# Altium PCB powerdriver.PcbDoc (part 1 of 2)
Units mil, origin at the board's own origin, x right, y up, seen from the top; angles counter-clockwise.
Board outline 9161.49 x 7551.49 mil, 2 copper layers (Top Layer, Bottom Layer); 98 components, 95 nets, 352 pads, 131 vias.
Unrouted connection lines stored in the file: 6.
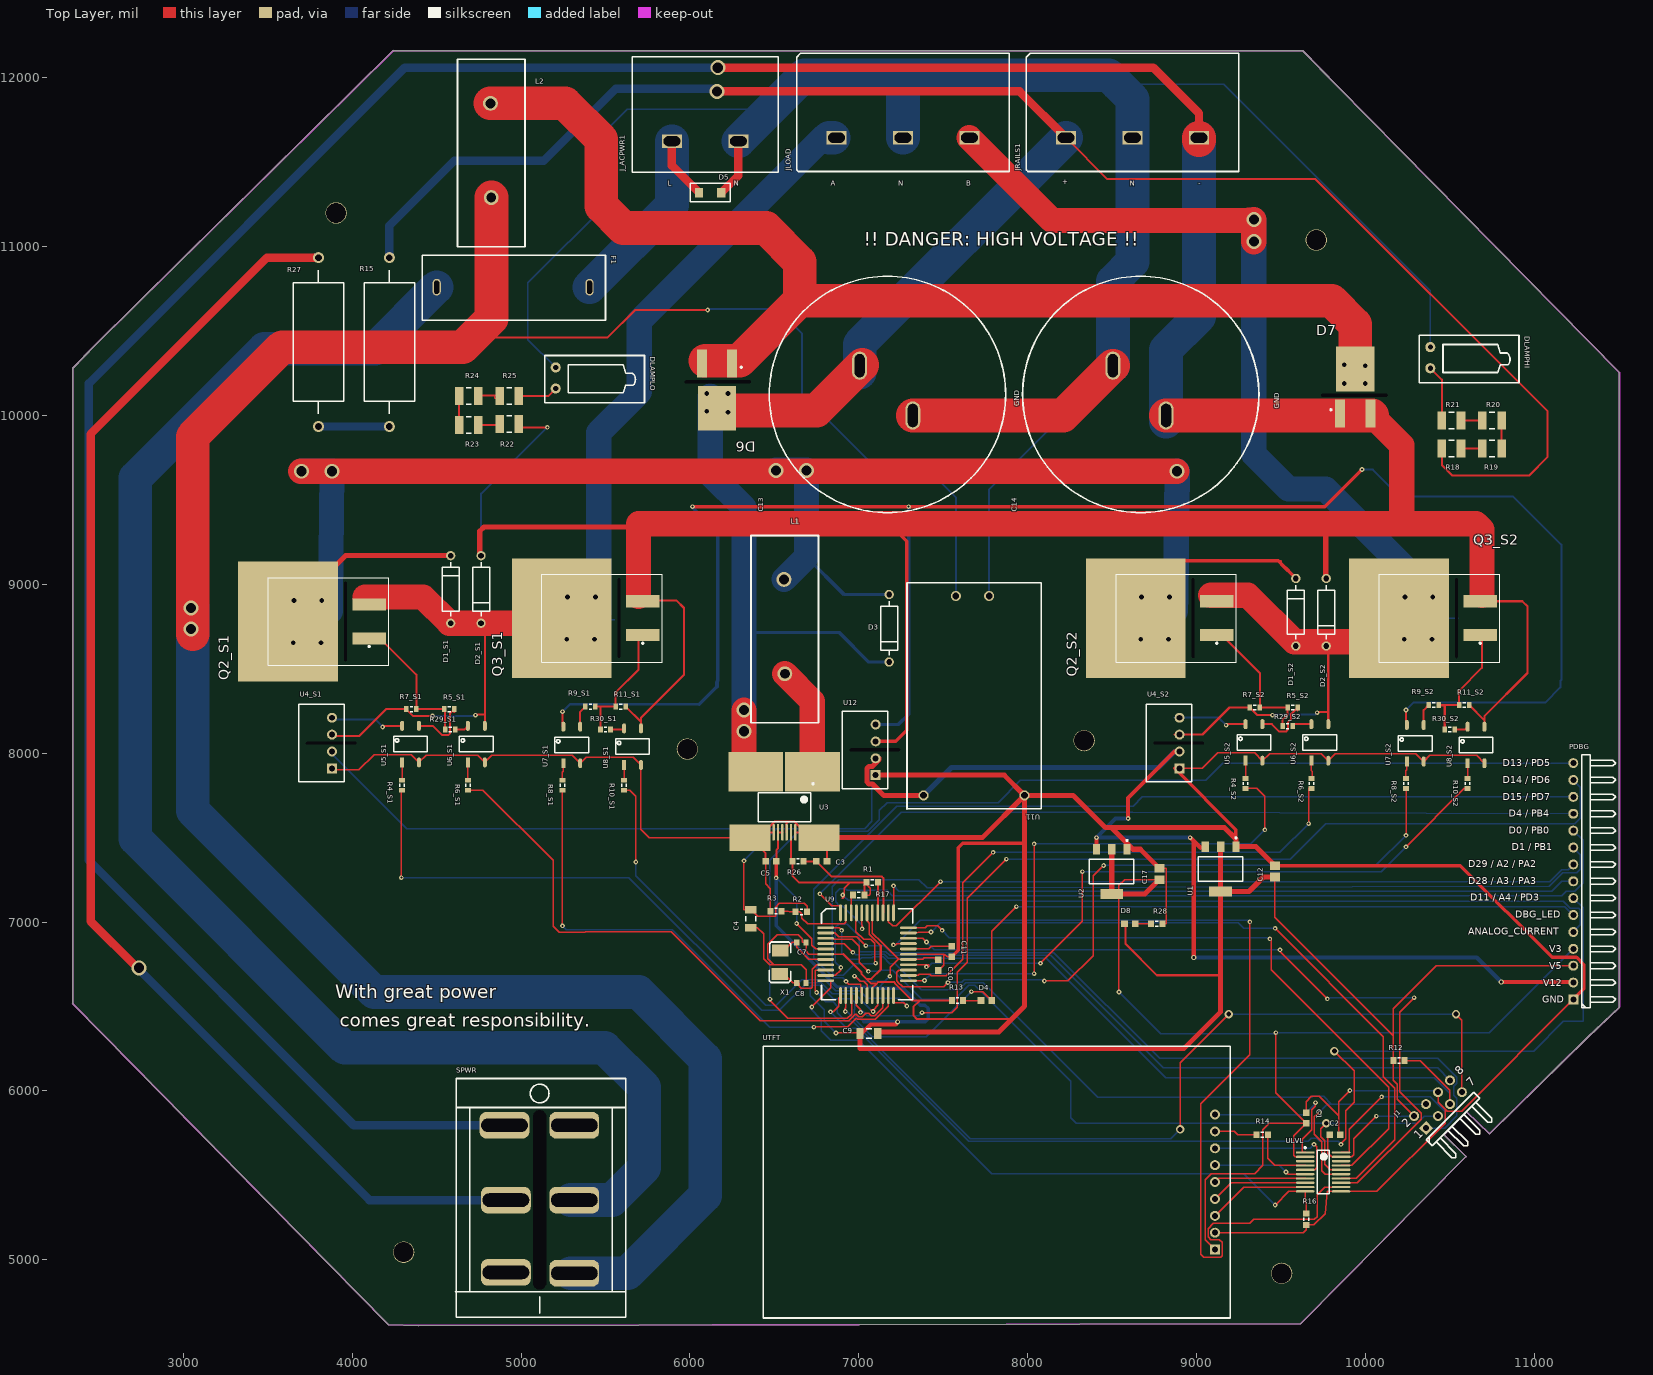
[diagram p0: Top Layer view]
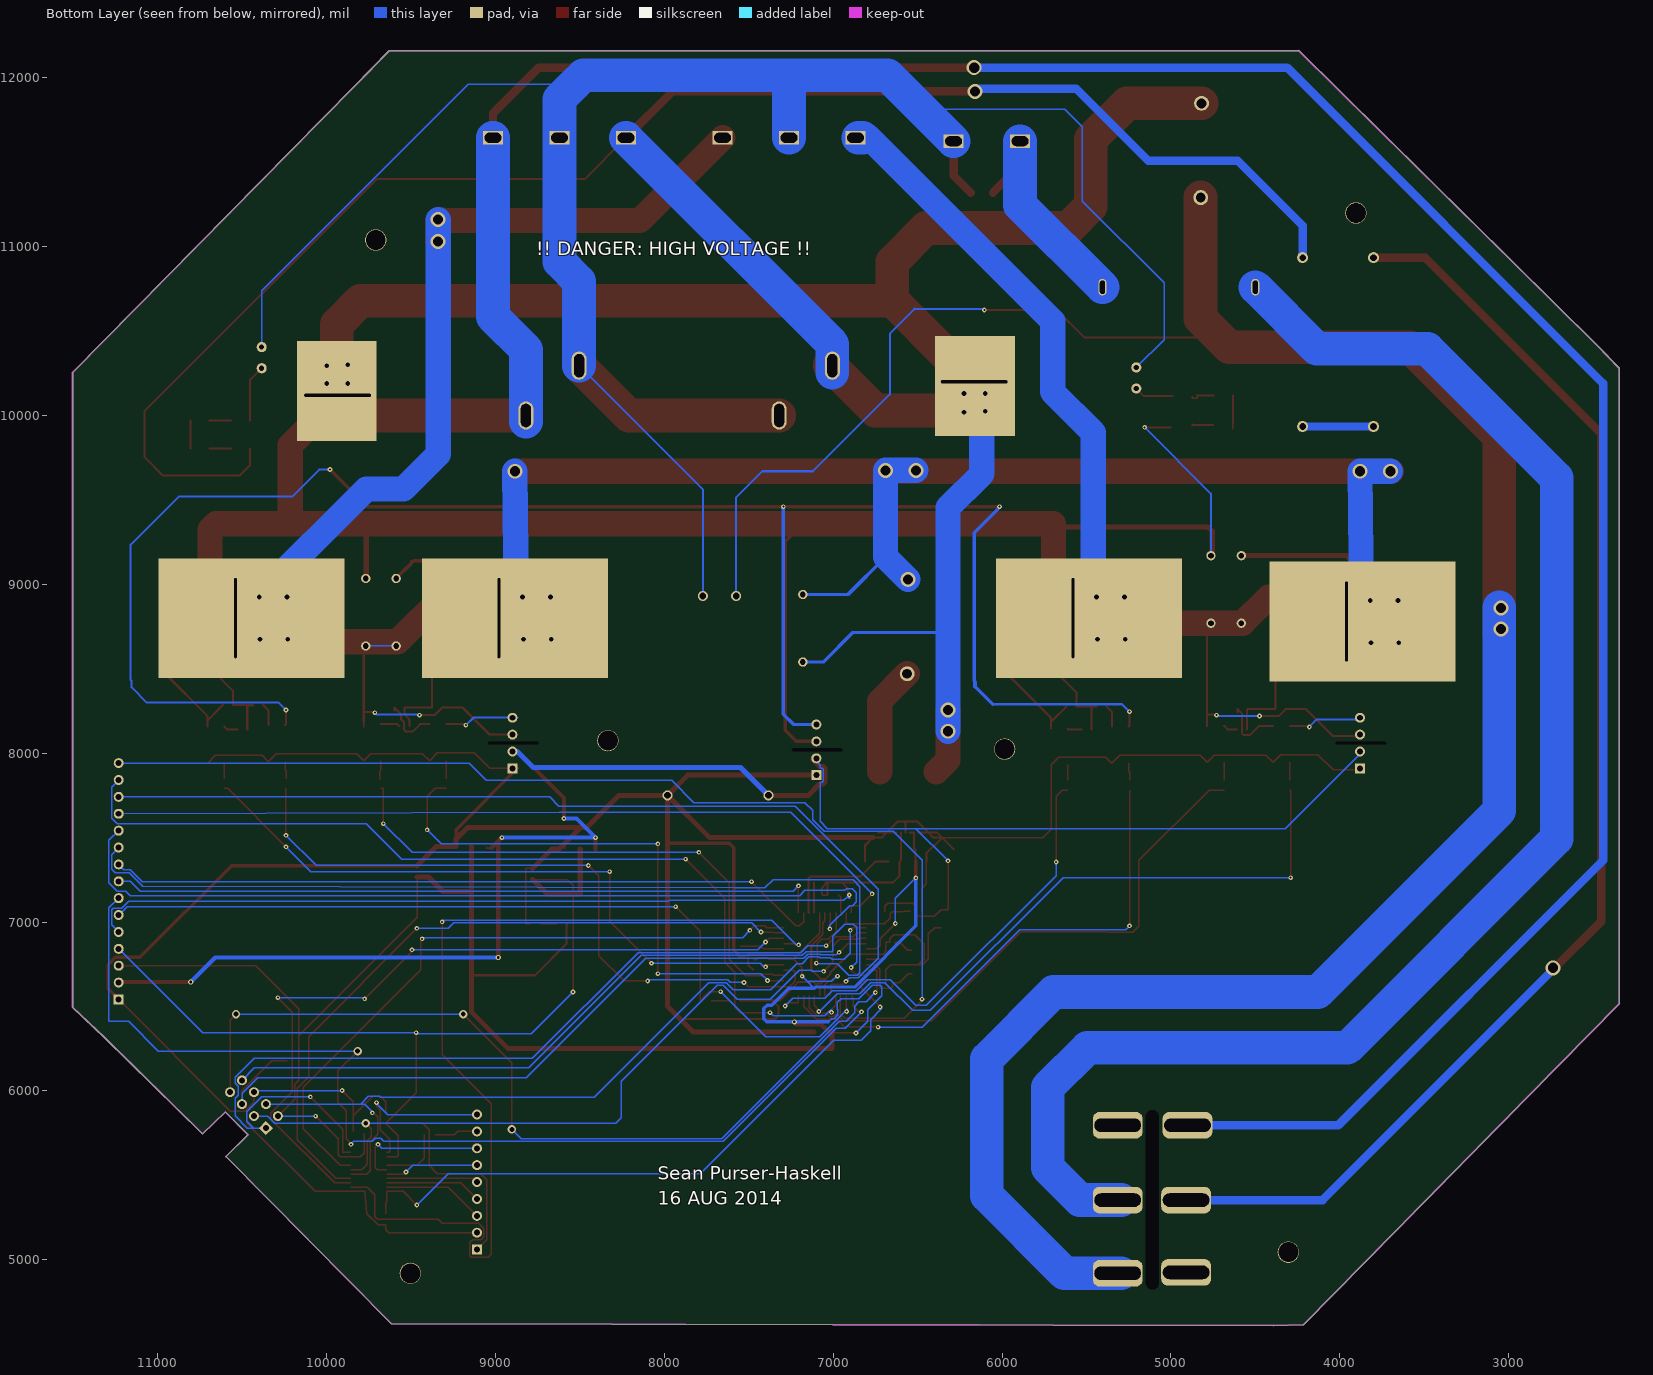
[diagram p1: Bottom Layer view, seen from below]

## Layer stack, top to bottom
Top Layer: signal copper 1.4
Dielectric: dielectric 12.6, FR-4, Dk 4.8
Bottom Layer: signal copper 1.4

## Board outline
9629.7,12160.37 9835,11950 11505,10255 11505,6495 11315,6315 10735.54,5745.41 10599.91,5874.91 10465.77,5740.77 10596.53,5611.17 9615.98,4620 4390,4610 4215,4615 2343.51,6517.06 2345,6518.55 2345,10280 2475,10415 4242.06,12161.49

## Design rules (kind name [scope] priority, off if disabled: settings)
Clearance [All] p1: gap=8
HoleSize [All] p1: absolutevalues=TRUE maxlimit=5000 minlimit=1 maxpercent=80.000 minpercent=20.000
MinimumSolderMaskSliver [All] p1: minsoldermaskwidth=4
PolygonConnect [All] p1: connectstyle=Relief reliefconductorwidth=10 reliefentries=4 polygonreliefangle="90 Angle"
RoomDefinition S2 [InComponentClass('S2')] p1: confinementstyle=ConfineIn formatcopy=FALSE lockcomponents=FALSE outline 8205.55,7650 11235.55,7650 11235.55,9410 8205.55,9410
RoomDefinition S1 [InComponentClass('S1')] p2: confinementstyle=ConfineIn formatcopy=TRUE lockcomponents=FALSE outline 3210,7640 6170,7640 6170,9400 3210,9400
RoomDefinition powerdriver [InComponentClass('powerdriver')] p3 off: confinementstyle=ConfineIn formatcopy=TRUE lockcomponents=FALSE outline 7500,4265 7850,4265 7850,4835 7500,4835
RoutingVias [All] p1: holewidth=28 width=50 viastyle="Through Hole" minholewidth=10 minwidth=20 maxholewidth=28 maxwidth=50
SilkToSilkClearance [All] p1: silktosilkclearance=0
SilkscreenOverComponentPads [All] p1: minsilkscreentomaskgap=0
SolderMaskExpansion [All] p1: expansion=4
Width [All] p1: maxlimit=200 minlimit=8 preferedwidth=8 minimp=50.000000 maximp=50.000000 favimp=50.000000
24 further rules are at their usual default settings.

## Classes and differential pairs
component class powerdriver: C1 C2 C3 C4 C5 C7 C8 C9 C10 C11 C12 C13 C14 C17 D3 D4 D5 D6 D7 D8 D? DLAMPHI DLAMPLO F1 J1 J_ACPWR1 JLOAD JRAILS1 JSPI L1 L2 PDBG R1 R2 R3 R12 R13 R14 R15 R16 R17 R18 R19 R20 R21 R22 R23 R24 R25 R26 R27 R28 R? SPWR U1 U2 U3 U5 U9 U10 U11 U12 U13 ULVL UTFT X1
component class S1: D1_S1 D2_S1 Q2_S1 Q3_S1 R4_S1 R5_S1 R6_S1 R7_S1 R8_S1 R9_S1 R10_S1 R11_S1 R29_S1 R30_S1 U4_S1 U5_S1 U6_S1 U7_S1 U8_S1
component class S2: D1_S2 D2_S2 Q2_S2 Q3_S2 R4_S2 R5_S2 R6_S2 R7_S2 R8_S2 R9_S2 R10_S2 R11_S2 R29_S2 R30_S2 U4_S2 U5_S2 U6_S2 U7_S2 U8_S2
channel class halfbridge: S1 S2

## Components (designator, comment, footprint, x,y, rotation, side; value= is the part's Value field where it differs from the comment)
C1 "100nF" CAPC1608N 9650,5840 r270 top
C2 "100nF" CAPC1608N 9820,5740 r180 top
C3 "1uF" CAPC1608N 6780,7360 r180 top
C4 "10uF" CAPC3216L 6360,7020 r90 top
C5 "100n" CAPC1608N 6480,7360 r0 top
C7 "18p" CAPC1608L 6660,6880 r180 top
C8 "18p" CAPC1608L 6660,6640 r180 top
C9 "10uF" CAPC3216L 7060,6340 r180 top
C10 "100nF" CAPC1608N 7470,6745 r270 top
C11 "100nF" CAPC1608N 7550,6825 r270 top
C12 "10uF" CAPC2012N 9465,7300 r90 top
C13 "Cap Pol3" Cap_450v_680uF 7320,10000 r90 top
C14 "Cap Pol3" Cap_450v_680uF 8820,10000 r90 top
C17 "10uF" CAPC2012N 8780,7285 r90 top
D1_S1 "MUR1100" DIODE-0.4 4582.87,8970 r90 top (schematic designator D1)
D1_S2 "MUR1100" DIODE-0.4 9588.43,8835 r90 top (schematic designator D1)
D2_S1 "MUR1100" DIODE-0.4 4762.87,8970 r270 top (schematic designator D2)
D2_S2 "MUR1100" DIODE-0.4 9768.43,8835 r270 top (schematic designator D2)
D3 "MUR1100" DIODE-0.4 7180,8740 r270 top
D4 "LED3" CAPC1608N 7755,6535 r180 top
D5 "SMAJ220CA" SMAJ220CA 6120,11320 r0 top
D6 "DLA10IM800UC" DLA10IM800UC 6160,10140 r270 top
D7 "DLA10IM800UC" DLA10IM800UC 9940,10180 r90 top
D8 "LED3" CAPC1608N 8605,6990 r0 top
DLAMPHI "Neon" NEON 10560,10240 r0 top
DLAMPLO "Neon" NEON 5380,10120 r0 top
F1 "" FuseHolder 4500,10760 r0 top
J1 "XSP" HDR2X4H 10360,5780 r45 top
J_ACPWR1 "HB635-2P" SCREW_TERM_2 6090,11625 r180 top
JLOAD "HB635-3P" SCREW_TERM_3 7470,11845 r180 top
JRAILS1 "HB635-3P" SCREW_TERM_3 8830,11845 r180 top
L1 "Inductor Iron" BigInductor 6561.89,8120 r270 top
L2 "Inductor Iron" BigInductor 4823.15,10940 r270 top
PDBG "Header 15H" HDR1X15H 11231.83,6541.43 r90 top
Q2_S1 "STB18NM80" STB18NM80 3860,8780 r180 top (schematic designator Q2)
Q2_S2 "STB18NM80" STB18NM80 8880,8800 r180 top (schematic designator Q2)
Q3_S1 "STB18NM80" STB18NM80 5480,8800 r180 top (schematic designator Q3)
Q3_S2 "STB18NM80" STB18NM80 10440,8800 r180 top (schematic designator Q3)
R1 "10k" RESC1608N 7080,7235 r0 top
R2 "10k" RESC1608N 6660,7060 r0 top
R3 "3.3k" RESC1608N 6510,7065 r0 top
R4_S1 "510" RESC1608L 4295,7810.63 r90 top (schematic designator R4)
R4_S2 "510" RESC1608L 9290.55,7820.63 r90 top (schematic designator R4)
R5_S1 "130" RESC1608L 4574.53,8260.63 r180 top (schematic designator R5)
R5_S2 "130" RESC1608L 9570.08,8270.63 r180 top (schematic designator R5)
R6_S1 "510" RESC1608L 4685,7810.63 r90 top (schematic designator R6)
R6_S2 "510" RESC1608L 9680.55,7820.63 r90 top (schematic designator R6)
R7_S1 "100k" RESC1608L 4350,8260.63 r0 top (schematic designator R7)
R7_S2 "100k" RESC1608L 9345.55,8270.63 r0 top (schematic designator R7)
R8_S1 "510" RESC1608L 5245,7810.63 r90 top (schematic designator R8)
R8_S2 "510" RESC1608L 10240.55,7820.63 r90 top (schematic designator R8)
R9_S1 "130" RESC1608L 5410,8275.63 r0 top (schematic designator R9)
R9_S2 "130" RESC1608L 10405.55,8285.63 r0 top (schematic designator R9)
R10_S1 "510" RESC1608L 5610,7810.63 r90 top (schematic designator R10)
R10_S2 "510" RESC1608L 10605.55,7820.63 r90 top (schematic designator R10)
R11_S1 "100k" RESC1608L 5590,8275.63 r180 top (schematic designator R11)
R11_S2 "100k" RESC1608L 10585.55,8285.63 r180 top (schematic designator R11)
R12 "10k" RESC1608N 10200,6180 r0 top
R13 "470" RESC1608N 7585,6535 r180 top
R14 "220" RESC1608N 9390,5740 r0 top
R15 "2.7k / 3W" AXIAL-1.0 4220,10435 r270 top
R16 "100k" RESC1608N 9650,5240 r90 top
R17 "10k" RESC1608N 7000,7160 r0 top
R18 "10k" RESC3225N 10510,9805 r180 top
R19 "10k" RESC3225N 10750,9805 r180 top
R20 "10k" RESC3225N 10750,9970 r0 top
R21 "10k" RESC3225N 10510,9970 r180 top
R22 "10k" CAPC3225N 4930,9950 r180 top
R23 "10k" RESC3225N 4690,9945 r0 top
R24 "10k" RESC3225N 4690,10115 r180 top
R25 "10k" RESC3225N 4930,10115 r180 top
R26 "10k" RESC1608N 6640,7360 r0 top
R27 "2.7k / 3W" AXIAL-1.0 3800,10435 r90 top
R28 "470" RESC1608N 8765,6990 r0 top
R29_S1 "130" RESC1608L 4580,8140 r180 top (schematic designator R29)
R29_S2 "130" RESC1608L 9540,8160 r180 top (schematic designator R29)
R30_S1 "130" RESC1608L 5500,8140 r180 top (schematic designator R30)
R30_S2 "130" RESC1608L 10500,8140 r180 top (schematic designator R30)
SPWR "SW DPDT" KCD2-202N 5620,4860 r90 top
U1 "AZ1117H-5.0" AZ1117H 9145,7340 r90 top
U2 "AZ1117H-3.3" AZ1117H 8500,7325 r90 top
U3 "CQ330A" CQ330A 6560,7680 r270 top
U4_S1 "B1212S-1W" B1212S-1W 3880,8060 r90 top (schematic designator U4)
U4_S2 "B1212S-1W" B1212S-1W 8900,8060 r90 top (schematic designator U4)
U5_S1 "EL357N" EL357N 4295,7945.63 r90 top (schematic designator U5)
U5_S2 "EL357N" EL357N 9290.55,7955.63 r90 top (schematic designator U5)
U6_S1 "EL357N" EL357N 4685,7945.63 r90 top (schematic designator U6)
U6_S2 "EL357N" EL357N 9680.55,7955.63 r90 top (schematic designator U6)
U7_S1 "EL357N" EL357N 5250,7940.63 r90 top (schematic designator U7)
U7_S2 "EL357N" EL357N 10245.55,7950.63 r90 top (schematic designator U7)
U8_S1 "EL357N" EL357N 5610,7930.63 r90 top (schematic designator U8)
U8_S2 "EL357N" EL357N 10605.55,7940.63 r90 top (schematic designator U8)
U9 "MCU" atmega644p 7060,6835 r90 top
U11 "HLK-PM12" HLK-PM01 7940,8780 r270 top
U12 "B1212S-1W" B1212S-1W 7100,8020 r90 top
ULVL "TXB0108PW" TXB0108PW 9750,5520 r0 top
UTFT "TFT_SPI" TFTLCD 8820,5160 r180 top
X1 "16MHz" XTAL 6540,6720 r180 top

## Footprints (in the part's own frame and the unit in brackets; to place one, negate y for a bottom-side part, rotate by r counter-clockwise, add the part's x,y. Pads: shape width x height; smd on the part's side, far side on the other; paste and mask are expansions set on the pad)
atmega644p [mil]
  oval 16x100 smd: 1(131.7,256.02) 2(100.7,256.02) 3(68.7,256.02) 4(37.7,256.02) 5(5.7,256.02) 6(-25.3,256.02) 7(-56.3,256.02) 8(-88.3,256.02) 9(-119.3,256.02) 10(-151.3,256.02) 11(-182.3,256.02) 23(-182.3,-233.98) 24(-151.3,-233.98) 25(-119.3,-233.98) 26(-88.3,-233.98) 27(-56.3,-233.98) 28(-25.3,-233.98) 29(5.7,-233.98) 30(37.7,-233.98) 31(68.7,-233.98) 32(100.7,-233.98) 33(131.7,-233.98)
  oval 100x16 smd: 12(-270.3,168.02) 13(-270.3,137.02) 14(-270.3,105.02) 15(-270.3,74.02) 16(-270.3,42.02) 17(-270.3,11.02) 18(-270.3,-19.98) 19(-270.3,-51.98) 20(-270.3,-82.98) 21(-270.3,-114.98) 22(-270.3,-145.98) 34(219.7,-145.98) 35(219.7,-114.98) 36(219.7,-82.98) 37(219.7,-51.98) 38(219.7,-19.98) 39(219.7,11.02) 40(219.7,42.02) 41(219.7,74.02) 42(219.7,105.02) 43(219.7,137.02) 44(219.7,168.02)
  silkscreen extent -295,-259 245,281, body extent -219,-189 191,217, height 39
AXIAL-1.0 [mm] "Axial Device, Thru-Hole; 2 Leads; 1.0 in Pin Spacing"
  round 1.65 hole 1: 1(-12.7,0) 2(12.7,0)
  silkscreen extent -10.79,-3.81 10.79,3.81
AZ1117H [mm]
  rect 1.55x1.1 smd: 1(2.702,-2.25) 2(2.702,0.05) 3(2.702,2.35)
  rect 1.55x3.45 smd: 2(-4.048,0.05)
  silkscreen extent -2.52,-3.3 4.15,3.4, body extent -2.45,-3.23 1.15,3.37, height 4
B1212S-1W [mm]
  rect 1.5x1.5 hole 0.9: 1(-3.81,0)
  round 1.5 hole 0.9: 2(-1.27,0) 3(1.27,0) 4(3.81,0)
  round 0 hole 0.406 slot 7.62 at 90 deg: ""(0,0.127)
  silkscreen extent -5.84,-1.83 5.84,5.03
BigInductor [mm]
  round 2.25 hole 1.5: 1(-23.098,-0.127) 2(-8.906,0)
  silkscreen extent -29.72,-5.08 -1.52,5.08
Cap_450v_680uF [mm]
  oval 4.25x2.25 hole 1.5 slot 3.5 at 0 deg: 1(7.5,8) 2(0,0)
  silkscreen extent -14.6,-13.97 20.95,21.59
CAPC1608L [mm] "Chip Capacitor, Body 1.6x0.8mm, IPC High Density"
  rect 0.8x0.9 smd: 1(-0.7,0) 2(0.7,0)
  body extent -0.87,-0.48 0.87,0.48, height 1.3
CAPC1608N [mm] "Chip Capacitor, Body 1.6x0.8mm, IPC Medium Density"
  rect 1x1 smd: 1(-0.8,0) 2(0.8,0)
  body extent -0.87,-0.48 0.87,0.48, height 0.85
CAPC2012N [mm] "Chip Capacitor, Body 2.0x1.3mm, IPC Medium Density"
  rect 1.3x1.5 smd: 1(-0.85,0) 2(0.85,0)
  body extent -1.1,-0.72 1.1,0.72, height 1.1
CAPC3216L [mm] "Chip Capacitor, Body 3.2x1.6mm, IPC High Density"
  rect 1.1x1.7 smd: 1(-1.35,0) 2(1.35,0)
  silkscreen extent -0.4,-0.75 0.4,0.75, body extent -1.7,-0.9 1.7,0.9, height 1.3
CAPC3225N [mm] "Chip Capacitor, Body 3.2x2.5mm, IPC Medium Density"
  rect 1.3x2.7 smd: 1(-1.45,0) 2(1.45,0)
  silkscreen extent -0.4,-1.25 0.4,1.25, body extent -1.7,-1.35 1.7,1.35, height 1.5
CQ330A [mm] "TSOP, 24-Leads, Body 7.9x5.6mm (max), Pitch 0.65mm, IPC Low Density"
  rect 4x6.2 smd: 1(4.572,-5.207) 8(4.572,5.207)
  oval 2.5x0.35 smd: 2(3.779,-1.625) 3(3.779,-0.975) 4(3.779,-0.325) 5(3.779,0.325) 6(3.779,0.975) 7(3.779,1.625)
  rect 6x8.25 smd: 9(-5.334,4.191) 10(-5.334,-4.318)
  silkscreen extent -3.65,-3.95 2.15,4.43, body extent -2.8,-3.95 2.8,3.95, height 1.15
DIODE-0.4 [mm] "Diode, Thru-Hole; 2 Leads; 0.4 in Pin Spacing"
  round 1.4 hole 0.85: 1(-5.08,0) 2(5.08,0)
  silkscreen extent -4.06,-1.27 4.06,1.27
DLA10IM800UC [mm] "D-PAK, 3-Pads, Body 6.3x6.8mm (max), IPC Low Density"
  rect 4.2x1.5 smd: 1(-4.254,2.28) 3(-4.254,-2.28)
  round 0 hole 0.406 slot 10 at 90 deg: 4(-1.524,0.127)
  rect 15x12 smd far side: 4(-0.889,0)
  rect 6.7x5.75 smd: 4(2.427,0)
  silkscreen extent -3.82,3.53 -3.58,3.78, body extent -3.5,-3.4 2.8,3.4, height 2.4
EL357N [mm]
  rect 1.5x0.6 smd: 1(0,0)
  oval 1.5x0.6 smd: 2(0,-2.54) 3(5.5,-2.54) 4(5.5,0)
  silkscreen extent 1.59,-3.81 3.92,1.27
FuseHolder [mm]
  oval 1.25x2.5 hole 0.75 slot 2 at 90 deg: 1(0,0) 2(23,0)
  silkscreen extent -2.16,-4.95 25.4,4.83
HDR1X15H [mm] "Connector; Header; 15 Position; Right Angle"
  rect 1.5x1.5 hole 0.9: 1(0,0)
  round 1.5 hole 0.9: 2(2.54,0) 3(5.08,0) 4(7.62,0) 5(10.16,0) 6(12.7,0) 7(15.24,0) 8(17.78,0) 9(20.32,0) 10(22.86,0) 11(25.4,0) 12(27.94,0) 13(30.48,0) 14(33.02,0) 15(35.56,0)
  silkscreen extent -1.27,-6.35 36.83,-1.27
HDR2X4H [mm] "Connector; Header; 4x2 Position; Right Angle"
  rect 1.5x1.5 hole 0.9: 1(0,0)
  round 1.5 hole 0.9: 2(0,2.54) 3(2.54,0) 4(2.54,2.54) 5(5.08,0) 6(5.08,2.54) 7(7.62,0) 8(7.62,2.54)
  silkscreen extent -1.27,-6.35 8.89,-1.27
HLK-PM01 [mil]
  round 60 hole 39.37: 1(-151,-168) 2(-151,-365) 3(1030,41.57) 4(1030,-556.31)
  silkscreen extent -230,-655 1110,140
KCD2-202N [mm]
  rrect50% 4x7.5 hole 2 slot 7 at 90 deg: 1(12.526,18.047) 2(23.788,18.247) 3(1.651,18.047) 4(23.788,7.747) 5(12.526,7.747) 6(1.524,7.747)
  round 0 hole 2 slot 27 at 0 deg: ""(12.573,12.954)
  silkscreen extent -5.08,0 30.81,25.63
NEON [mil]
  round 60 hole 30: 1(-175,165) 2(-175,40)
  silkscreen extent -240,-45 351,235
RESC1608L [mm] "Chip Resistor, Body 1.6x0.8mm, IPC High Density"
  rect 0.7x0.9 smd: 1(-0.75,0) 2(0.75,0)
  silkscreen extent -0.2,-0.35 0.2,0.35, body extent -0.85,-0.48 0.85,0.48, height 0.9
RESC1608N [mm] "Chip Resistor, Body 1.6x0.8mm, IPC Medium Density"
  rect 0.9x1 smd: 1(-0.85,0) 2(0.85,0)
  silkscreen extent -0.2,-0.4 0.2,0.4, body extent -0.85,-0.48 0.85,0.48, height 0.6
RESC3225N [mm] "Chip Resistor, Body 3.2x2.5mm, IPC Medium Density"
  rect 1.3x2.7 smd: 1(-1.45,0) 2(1.45,0)
  silkscreen extent -0.4,-1.25 0.4,1.25, body extent -1.68,-1.32 1.68,1.32, height 0.71
SCREW_TERM_2 [mm]
  rect 3x2 hole 1.5 slot 2.5 at 0 deg: 1(-5,0) 2(5,0)
  silkscreen extent -11,-12.7 10.97,4.7
SCREW_TERM_3 [mm]
  rect 3x2 hole 1.5 slot 2.5 at 0 deg: 1(-4.699,5.08) 2(5.301,5.08) 3(15.301,5.08)
  silkscreen extent -10.7,-7.62 21.27,10.16
SMAJ220CA [mm]
  rect 1.27x1.47 smd: 1(-1.685,0) 2(1.685,0)
  silkscreen extent -2.99,-1.4 2.99,1.4
STB18NM80 [mm] "D2-PAK, 3-Pads, Body 9.4x10.4mm (max), IPC Low Density"
  rect 5x1.85 smd: 1(-6.1,2.55) 3(-6.1,-2.55)
  round 0 hole 0.406 slot 12 at 90 deg: 2(-2.54,0)
  rect 28x18 smd far side: 2(-0.127,0)
  rect 15x18 smd: 2(6.096,0)
  silkscreen extent -9.05,-6.6 9.05,6.6
TFTLCD [mm]
  rect 1.5x1.5 hole 0.9: 1(-7.366,2.54)
  round 1.5 hole 0.9: 2(-7.366,0) 3(-7.366,-2.54) 4(-7.366,-5.08) 5(-7.366,-7.62) 6(-7.366,-10.16) 7(-7.366,-12.7) 8(-7.366,-15.24) 9(-7.366,-17.78)
  silkscreen extent -9.65,-28.07 60.58,12.83
TXB0108PW [mm] "TSOP, 20-Leads, Body 6.6x4.5mm (max), Pitch 0.65mm, IPC Low Density"
  oval 2.8x0.35 smd: 1(-2.7,2.925) 2(-2.7,2.275) 3(-2.7,1.625) 4(-2.7,0.975) 5(-2.7,0.325) 6(-2.7,-0.325) 7(-2.7,-0.975) 8(-2.7,-1.625) 9(-2.7,-2.275) 10(-2.7,-2.925) 11(2.7,-2.925) 12(2.7,-2.275) 13(2.7,-1.625) 14(2.7,-0.975) 15(2.7,-0.325) 16(2.7,0.325) 17(2.7,0.975) 18(2.7,1.625) 19(2.7,2.275) 20(2.7,2.925)
  silkscreen extent -2.82,-3.3 0.9,3.77, body extent -2.25,-3.3 2.25,3.3, height 1.2
XTAL [mm]
  rect 2.5x1.8 smd: 1(0.179,0.691) 2(0.154,-2.834)
  silkscreen extent -1.45,-4.11 1.78,1.99, body extent -0.89,-3.35 1.4,1.35, height 2.54

## Part data
C1 C2 C3 C5 C10 C11: library part CAP, "Capacitor"
C4 C7 C8 C9: library part Cap, "Capacitor"
C12 C17: library part "Cap Pol2", "Polarized Capacitor (Axial)"
C13 C14: "Polarized Capacitor (Surface Mount)"
D4 D8: "Typical BLUE SiC LED"
DLAMPHI DLAMPLO: "Neon Bulb"
F1: library part "Fuse Thermal", "Thermal Fuse"
J1: library part "Header 4X2H", "Header, 4-Pin, Dual row, Right Angle"
J_ACPWR1: library part "Header 2", "Header, 2-Pin"
JLOAD JRAILS1: library part "Header 3", "Header, 3-Pin"
L1 L2: "Magnetic-Core Inductor"
PDBG: "Header, 15-Pin, Right Angle"
R1 R2 R3 R4_S1 R4_S2 R5_S1 R5_S2 R6_S1 R6_S2 R7_S1 R7_S2 R8_S1 R8_S2 R9_S1 R9_S2 R10_S1 R10_S2 R11_S1 R11_S2 R12 R13 R14 R15 R16 R17 R18 R19 R20 R21 R22 R23 R24 R25 R26 R27 R28 R29_S1 R29_S2 R30_S1 R30_S2: library part Res2, "Resistor"
SPWR: "Switch"
U1 U2: library part AZ1117H
U5_S1 U5_S2 U6_S1 U6_S2 U7_S1 U7_S2 U8_S1 U8_S2: library part EL367N
U9: library part ATmega644-20AU, "8-bit AVR Microcontroller, 2.7-5.5V, 20MHz, 64KB Flash, 2KB EEPROM, 4KB SRAM, 44-pin TQFP"
X1: library part XTAL, "Crystal Oscillator"

## Free pads (board coordinates)
  round 125.98 hole 118.11: 9(3904.54,11199.56) 9(4304.54,5044.56) 9(5984.54,8024.56) 9(8334.54,8074.56) 9(9504.54,4919.56) 9(9709.54,11039.56)

## Via types
v1: diameter 27.56, hole 11.81, Top Layer to Bottom Layer, 85 vias
v2: diameter 50, hole 28, Top Layer to Bottom Layer, 29 vias
v3: diameter 88.58, hole 60, Top Layer to Bottom Layer, 14 vias
v4: diameter 30, hole 15, Top Layer to Bottom Layer, 3 vias

## Nets (pads, with @x,y where several pads share a name; then routed paths per layer and width w, separated by ;. In a path a pad name is that pad's centre, name@x,y a point inside that pad or via, vN(x,y) a via of type N, cw(c..) or ccw(c..) an arc to the next point about the centre after c; other vN are vias at no path point)
A_HIGH_SWCLOSE: R4_S1.1 U9.19 | length 3906.8
  Top Layer w8: v1(4291,7263) 4291,7781.1 R4_S1.1@4295,7781.1 ; v1(7085,6470) 7084,6470 7072,6482 7085,6482 7088,6482 7111.98,6505.98 U9.19@7111.98,6564.7
  Bottom Layer w8: v1(4291,7263) 5639,7263 6424,6478 6529.74,6478 6693.44,6641.69 6777.33,6641.69 6842.21,6576.81 6977.19,6576.81 7084,6470 v1(7085,6470)
A_HIGH_SWOPEN: R6_S1.1 U9.20 | length 3381.7
  Top Layer w8: R6_S1.1@4685,7781.1 4774,7781.1 5190,7365.1 5190,6976 5225,6941 5380,6941 5381,6942 5889,6942 6416.38,6414.62 6939.58,6414.62 6978.04,6453.08 6985.46,6453.08 6999.32,6439.22 7020.68,6439.22 7040.69,6459.24 7059.31,6459.24 7074.32,6444.22 7095.68,6444.22 7142.98,6491.52 U9.20@7142.98,6564.7
A_LOW_SWCLOSE: R8_S1.1 U9.21 | length 3103.1
  Top Layer w8: v1(5245,6978) R8_S1.1@5245,7781.1 ; v1(6734,6377) 6737,6380 6935,6380 6985.46,6430.46 6992.69,6423.22 7097.31,6423.22 7174.98,6500.89 U9.21@7174.98,6564.7
  Bottom Layer w8: v1(5245,6978) 5268,6955 5896,6955 6474,6377 v1(6734,6377)
A_LOW_SWOPEN: R10_S1.1 U9.22 | length 2734.4
  Top Layer w8: R10_S1.1@5610,7781.1 5642.9,7781.1 5680,7744 v1(5680,7356) ; U9.22@7205.98,6564.7 7205.98,6523 7265,6523 v1(7285,6503)
  Bottom Layer w8: v1(5680,7356) 5680,7274 6448,6506 6511,6506 6662.69,6657.69 6799.02,6657.69 6863.91,6592.81 7007,6592.81 7050.81,6549 7239,6549 v1(7285,6503)
AC_HOT_FUSED: F1.1 SPWR.5 | length 9003.5
  Bottom Layer w200: F1.1@4500,10760 4135,10395 3480,10395 2715,9630 2715,7495 3955,6255 5495,6255 5730,6020 5730,5545 5538.15,5353.15 SPWR.5@5315,5353.15 SPWR.5@5295,5353.15
AC_HOT_SW: L2.2 SPWR.6 U11.2 | length 14788.6
  Top Layer w12: 4712.5,10462.5 5512.5,10462.5 5675,10625 v1(6105,10625)
  Top Layer w200: v3@3055,8705 3055,9875 3585,10405 4655,10405 4712.5,10462.5 4825,10575 L2.2@4825,11290.63
  Bottom Layer w12: v1(6105,10625) 6105,10630 6520,10630 ; 6515,10635 6520,10630 ; U11.2@7575,8931 7575,9515 7420,9670 7120,9670 6665,10125 6665,10485 6520,10630
  Bottom Layer w200: v3@3055,8865 3055,7660 4130,6585 5695,6585 6090,6190 6090,5380 5630,4920 SPWR.6@5315,4920 SPWR.6@5295,4920
  other v3: 3045,8735 3045,8860
AC_NEUTRAL: C13.2 C14.1 D5.2 DLAMPHI.1 DLAMPLO.1 J_ACPWR1.1 JLOAD.2 JRAILS1.2 U11.1 | length 14830.4
  Top Layer w50: D5.2@6186.34,11320 6286.85,11420.51 J_ACPWR1.1@6286.85,11625
  Top Layer w200: C13.2@7320,10000 8209.76,10000 C14.1@8505.04,10295.28
  Bottom Layer w8: DLAMPLO.1@5205,10285 5040,10450 5040,10785 5525,11270 5525,11710 5630,11815 6398,11815 6488,11905 ; J_ACPWR1.1@6286.85,11625 6286.85,11691.85 ; 6560,11905 6500,11905 ; 7261.3,11993.7 6655.55,11993.7 6576.7,11993.7 6488,11905 ; 8532.5,11962.5 9162.5,11962.5 10385,10740 DLAMPHI.1@10385,10405 ; 6286.85,11691.85 6286.85,11703.85 6488,11905 ; 6286.85,11691.85 6500,11905 ; 6488,11905 6500,11905
  Bottom Layer w12: U11.1@7772,8931 7772,9562.24 C14.1@8505.04,10295.28
  Bottom Layer w200: J_ACPWR1.1@6286.85,11625 6655.55,11993.7 6676.85,12015 8480,12015 8532.5,11962.5 8621.3,11873.7 JRAILS1.2@8621.3,11645 8621.3,10911.3 8505.04,10795.04 C14.1@8505.04,10295.28 ; JLOAD.2@7261.3,11645 7261.3,11993.7
ANALOG_CURRENT: PDBG.5 R1.1 R17.2 R26.1 U3.6 | length 5730.2
  Top Layer w8: v1(6905,7160) 6905,7145 6900,7140 6905,7140 6915,7150 6915,7160 6915,7200 6950,7235 R1.1@7033.46,7235 ; R17.2@7033.46,7160 7061,7160 7069,7168 7069,7200 7040.27,7228.73 R1.1@7034,7235 ; R1.1@7033.46,7221.93 R1.1@7033.46,7235 ; R1.1@7046.54,7235 R1.1@7034,7235 ; R1.1@7033.46,7235 R1.1@7034,7235
  Top Layer w12: U3.6@6598.39,7531.22 6598.39,7368.15 R26.1@6606.54,7360 6606.54,7273.46 6645,7235 6950,7235 7033.46,7235 7034,7235 R1.1@7046.54,7235 ; R17.2@7033.46,7160 R1.1@7033.46,7221.93
  Bottom Layer w8: v1(6905,7160) 6905,7145 6900,7140 6905,7140 6915,7150 6937,7128 7970,7128 7974,7124 11173,7124 11214.04,7082.96 11264,7082.96 11273.35,7073.6 11273.35,6982.96 PDBG.5@11231.83,6941.43
AVG_CURRENT: C3.2 R26.2 U9.36 | length 719.6
  Top Layer w12: R26.2@6673.46,7360 C3.2@6748.5,7360 6839.82,7268.69 7136.98,7268.69 7145.18,7260.48 7145.18,7056.91 U9.36@7142.98,7054.7
B_HIGH_SWCLOSE: R4_S2.1 U9.23 | length 3263.5
  Top Layer w8: U9.23@7293.98,6652.7 7387.7,6652.7 v1(7389,6654) ; v1(8039,6694) v1(8039,7463) ; R4_S2.1@9290.55,7791.1 9357.9,7791.1 9405,7744 v1(9405,7546)
  Bottom Layer w8: v1(7389,6654) 7429,6694 v1(8039,6694) ; v1(8039,7463) 9322,7463 v1(9405,7546)
B_HIGH_SWOPEN: R6_S2.1 U9.24 | length 3240.6
  Top Layer w8: U9.24@7293.98,6683.7 7351,6683.7 7358.3,6691 7420,6691 7430,6681 7516.69,6681 7615,6779.31 7615,7232 v1(7796,7413) ; v1(9664,7583) 9664,7791.1 R6_S2.1@9680.55,7791.1
  Bottom Layer w8: v1(7796,7413) 9494,7413 v1(9664,7583)
B_LOW_SWCLOSE: R8_S2.1 U9.25 | length 4086.4
  Top Layer w8: U9.25@7293.98,6715.7 7237.7,6715.7 7226,6704 7226,6652.83 7231.98,6646.85 7231.98,6644.42 7259.39,6617 7503,6617 v1(7528.16,6642.16) ; v1(8099,6651) 8239,6651 8389,6801 8389,7274 v1(8450,7335) ; R8_S2.1@10240.55,7791.1 10241,7791.1 v1(10241,7514)
  Bottom Layer w8: v1(7528.16,6642.16) 7608.67,6642.16 7623.51,6657 8093,6657 v1(8099,6651) ; v1(8450,7335) 10062,7335 v1(10241,7514)
B_LOW_SWOPEN: R10_S2.1 U9.26 | length 3960.1
  Top Layer w8: U9.26@7293.98,6746.7 7400,6746.7 7410.3,6746.7 7411,6746 7417,6740 7412,6735 v1(7400,6735) ; v1(8076,6756) 8324,7004 v1(8324,7298) ; v1(10241,7445) 10587.1,7791.1 R10_S2.1@10605.55,7791.1
  Bottom Layer w8: v1(7400,6735) 7412,6735 7433,6756 v1(8076,6756) ; v1(8324,7298) 10094,7298 v1(10241,7445)
CURRENT_LIMIT: R2.1 R3.2 U9.43 | length 483.5
  Top Layer w8: R3.2@6543.46,7065 6582,7065 6587,7060 R2.1@6626.54,7060 6651,7060 6663,7048 6663,7024 6697,6990 6912.98,6990 6922.98,7000 U9.43@6922.98,7054.7
DBG_LED: D4.1 PDBG.6 U9.13 | length 5126.7
  Top Layer w8: v1(6920,6470) 6920,6484 6917,6487 6922.98,6492.98 U9.13@6922.98,6564.7 ; v1(7667,6588) 7733.5,6588 D4.1@7786.5,6535 7786.5,6944.5 v1(7933,7091)
  Bottom Layer w8: v1(6920,6470) v1@6920,6480.05 ; v1(7667,6588) 7399,6320 7080.05,6320 6925.02,6475.02 v1@6920,6480.05 ; v1(7933,7091) 11182.25,7091 PDBG.6@11231.83,7041.43 ; v1@6920,6480.05 6920,6484 6917,6487 6917,6483.05 v1@6920,6480.05
GND: C1.1 C2.1 C3.1 C4.1 C5.1 C7.1 C8.1 C9.1 C10.2 C11.2 C12.2 C17.2 J1.6 PDBG.1 R3.1 R13.2 R16.1 R28.2 U1.1 U2.1 U3.1 U3.2 U3.5 U3.7 U3.8 U4_S1.1 U4_S2.1 U5_S1.2 U5_S2.2 U6_S1.2 U6_S2.2 U7_S1.2 U7_S2.2 U8_S1.2 U8_S2.2 U9.6 U9.18 U9.28 U9.39 U11.3 U12.1 ULVL.11 UTFT.2 | length 25208.6
  Top Layer w8: U4_S1.1@3875,7900.63 4038.63,7900.63 4130,7992 4348.63,7992 U5_S1.2@4395,7945.63 4437.37,7988 4742.63,7988 U6_S1.2@4785,7945.63 4826.37,7987 5303.63,7987 U7_S1.2@5350,7940.63 5386.37,7977 5663.63,7977 U8_S1.2@5710,7930.63 5710,7550 5760,7500 U3.1@6355,7500 ; U3.1@6283,7428 U3.1@6355,7500 ; C4.1@6360,6966.85 6400,6966.85 6437,6929.85 6437,6784 6474,6747 6496,6747 ; U3.1@6386.22,7531.22 U3.1@6355,7500 ; C5.1@6448.5,7360 6448.5,7226.03 6476.54,7198 R3.1@6476.54,7065 ; C8.1@6687.56,6640 6687.56,6717.44 6658,6747 6496,6747 ; 6909.3,6809.7 U9.6@6803.98,6809.7 6704,6809.7 6687.56,6826.14 C7.1@6687.56,6880 6666,6880 6666,6900 6640,6926 6517,6926 6461,6870 6461,6782 6496,6747 ; U9.39@7048.98,7054.7 7048.98,7007 7062,6993.98 7062,6929 7130,6861 ; U9.18@7079.98,6564.7 7079.98,6610 7104.98,6635 7114.98,6645 ; U9.28@7293.98,6809.7 7502,6809.7 ; C10.2@7470,6713.5 7502,6745.5 7502,6809.7 ; C11.2@7550,6793.5 7526,6793.5 7502,6809.7 ; 7972.31,7465.69 7981.57,7456.43 7982,7456 ; U2.1@8588.57,7431.37 8588.57,7466.43 ; C17.2@8780,7318.46 8822,7318.46 8822,6990 R28.2@8798.46,6990 ; U4_S2.1@8870.55,7910.63 9034.63,7910.63 9126,8002 9344.18,8002 U5_S2.2@9390.55,7955.63 9432.92,7998 9738.18,7998 U6_S2.2@9780.55,7955.63 9821.92,7997 10299.18,7997 U7_S2.2@10345.55,7950.63 10381.92,7987 10659.18,7987 U8_S2.2@10705.55,7940.63 ; UTFT.2@9110,5160 9632,5160 9650,5178 R16.1@9650,5206.54 9696,5206.54 9762.06,5272.6 9773.18,5404.84 ULVL.11@9856.3,5404.84 10068.84,5404.84 10473,5809 10473,5891.11 ; C1.1@9650,5871.5 9650,5936 9681,5967 9726,5967 9841.5,5851.5 ; 9841.5,5760 9841.5,5851.5 ; v1(9908,6002) 9841.5,5935.5 9841.5,5851.5 ; J1.6@10430.71,5992.13 10430.71,5933.4 10473,5891.11 ; PDBG.1@11231.83,6541.43 10570.29,5879.89 10484.22,5879.89 10473,5891.11
  Top Layer w12: U3.1@6386.22,7531.22 U3.1@6437.51,7531.22 ; C5.1@6448.5,7360 6448.5,7406.5 U3.1@6355,7500 6406.29,7500 U3.1@6437.51,7531.22 ; U3.2@6496.02,7531.22 U3.1@6437.51,7531.22 ; U3.5@6572.8,7531.22 6572.8,7586.66 6580.57,7594.43 ; U3.7@6623.98,7531.22 U3.8@6682.49,7531.22 ; U3.8@6733.78,7531.22 U3.8@6682.49,7531.22 ; C3.1@6811.5,7360 6811.5,7453.5 U3.8@6765,7500 6713.71,7500 U3.8@6682.49,7531.22 ; 6909.3,6809.7 7015,6704 7015,6693.75 7045.28,6663.47 ; 7104.98,6635 7073.75,6635 7045.28,6663.47 ; 7114.98,6645 7208.37,6645 7213.98,6639.4 7213.98,6636.96 7315.94,6535 7360,6535 ; 7130,6861 7130,6719 7074.47,6663.47 7045.28,6663.47 ; R13.2@7551.54,6535 7360,6535 ; 7900,6426 7344,6426 7322.93,6447.07 7322.93,6497.93 7360,6535 ; U3.1@6437.51,7531.22 6500.72,7594.43 6580.57,7594.43 ; 6580.57,7594.43 6619.28,7594.43 U3.8@6682.49,7531.22
  Top Layer w20: C11.2@7550,6793.5 7551.83,6793.5 7590,6831.67 7590,7439.69 7616,7465.69 7972.31,7465.69 ; U4_S2.1@8870.55,7910.63 9233.57,7547.61 9233.57,7491.43 ; C12.2@9465,7333.46 10563.54,7333.46 11106,6791 11251,6791 11295,6747 11295,6604.6 PDBG.1@11231.83,6541.43
  Top Layer w30: U3.8@6765,7500 7731.57,7500 U11.3@7981.57,7750 ; C9.1@7113.15,6350 7830,6350 7981.57,6501.57 7981.57,7456.43 U11.3@7981.57,7750 ; U12.1@7120,7870 7861.57,7870 U11.3@7981.57,7750 ; C17.2@8780,7318.46 8667.09,7431.37 8623.63,7431.37 8588.57,7466.43 8495,7560 ; C12.2@9465,7333.46 9352.09,7446.37 U1.1@9233.57,7446.37 9233.57,7491.43 9165,7560 8495,7560 ; U11.3@7981.57,7750 8269.94,7750 8459.94,7560 8495,7560
  Bottom Layer w8: v1(9908,6002) 10420.84,6002 J1.6@10430.71,5992.13
HIGH_RAIL: C13.1 D3.2 D6.4 JRAILS1.3 R15.1 R18.2 U3.10 | length 15465.5
  Top Layer w12: JRAILS1.3@8227.6,11645 8472.6,11400 9705,11400 11080,10025 11080,9755 10970,9645 10515,9645 10452.91,9707.09 R18.2@10452.91,9805
  Top Layer w50: v3(6160,11920) 7952.6,11920 JRAILS1.3@8227.6,11645
  Top Layer w150: v3(6320,8255) 6320,7960 U3.10@6390,7890
  Top Layer w200: D6.4@6170,10030 6750,10030 C13.1@7020,10300
  Bottom Layer w20: 6350,8715 6885,8715 7060,8540 D3.2@7180,8540
  Bottom Layer w50: R15.1@4220,10935 4220,11125 4605,11510 5135,11510 5560,11935 6145,11935 v3(6160,11920)
  Bottom Layer w150: D6.4@6120,10115 6120,9655 6320,9455 v3(6320,8130)
  Bottom Layer w200: C13.1@7005.04,10255 C13.1@7005.04,10295.28 7005.04,10422.44 JRAILS1.3@8227.6,11645
  other v2: 6225,10020 6100,10025 6100,10130 6225,10130
LCD_CS: U9.30 ULVL.12 | length 5685.8
  Top Layer w8: v1(7205,6865) 7214,6865 7216,6863 7225.7,6872.7 U9.30@7293.98,6872.7 ; v1(9316,7001) 9316,6214 9026,5924 9026,5032 9042,5016 9144,5016 9152,5024 9152,5102.47 9136,5118.47 9086,5118.47 9068.47,5136 9068.47,5184 9100.47,5216 9316,5216 9340,5240 9699,5240 9714,5255 9714,5384.43 9760,5430.43 ULVL.12@9856.3,5430.43
  Bottom Layer w8: v1(7205,6865) 7214,6865 7216,6863 7364,7011 9306,7011 v1(9316,7001)
LCD_DCRS: U9.32 ULVL.14 | length 4167.2
  Top Layer w8: U9.32@7293.98,6935.7 7346,6935.7 7351.3,6941 v1(7428,6941) ; v1(9465.99,6963.01) 10107,6322 10107,6083 10173,6017 10173,5709.61 9945,5481.61 ULVL.14@9856.3,5481.61
  Bottom Layer w8: v1(7428,6941) 7482,6995 9246.86,6995 9278.85,6963.01 v1(9465.99,6963.01)
LCD_LED: U9.33 ULVL.17 | length 3994.3
  Top Layer w8: U9.33@7293.98,6966.7 7393.5,6966.7 7405.15,6978.35 7466.35,6978.35 v1(7494,6950.7) ; v1(9435,6901) 9442,6908 9442,6901 9442,6717 10138.71,6020.29 10138.71,5777.1 9920,5558.39 ULVL.17@9856.3,5558.39
  Bottom Layer w8: v1(7494,6950.7) 7536.7,6908 9435,6908 9442,6908 v1(9435,6901)
LCD_OE: R16.2 U9.11 ULVL.10 | length 3864.7
  Top Layer w8: v1(6721.64,6497) 6835,6610.36 6835,6652.7 U9.11@6803.98,6652.7 ; v1(9466.16,5324) 9547,5404.84 ULVL.10@9643.7,5404.84 9643.7,5342.3 9650,5336 R16.2@9650,5273.46
  Bottom Layer w8: v1(6721.64,6497) 6713,6488.36 6778.78,6422.57 6778.78,6357.22 6835,6301 6996,6301 7787,5510 9280.16,5510 v1(9466.16,5324)
LCD_RESET: U9.31 ULVL.13 | length 4584.4
  Top Layer w8: U9.31@7293.98,6903.7 7379.3,6903.7 v1(7401,6882) ; v1(9495,6835) 9495,6825 v1(9775,6545) ; ULVL.13@9856.3,5456.02 9953.33,5456.02 10330.82,5833.51 10330.82,5867.91 10205,5993.73 10205,6049.59 10203,6051.59 10203,6466 v1(10289,6552)
  Bottom Layer w8: v1(7401,6882) 7448,6835 v1(9495,6835) ; v1@9778,6552 v1(10289,6552)
LOAD_S1: D1_S1.1 D2_S1.2 JLOAD.3 Q2_S1.3 Q3_S1.2 R7_S1.1 U4_S1.3 U6_S1.3 | length 7409.3
  Top Layer w8: 4075,8925 4075,8891.02 Q2_S1.3@4115.16,8891.02 ; Q3_S1.2@5155,8770 5155,8732 Q3_S1.2@5215,8732 ; Q3_S1.2@5245,8665.63 5245,8665 5215,8665 Q3_S1.2@5215,8732 ; Q3_S1.2@5250,8915.63 5215,8880.63 Q3_S1.2@5215,8852.63 ; Q3_S1.2@5385.37,8790.63 5323.37,8852.63 Q3_S1.2@5215,8852.63 ; Q3_S1.2@5215,8732 5215,8790.63 Q3_S1.2@5215,8852.63
  Top Layer w12: U4_S1.3@3875,8100.63 3880,8100.63 4040,8100.63 4200,8260.63 R7_S1.1@4320.47,8260.63 4361.1,8220 v1(4475,8220) ; v1(4730,8225) 4735,8230 4785,8230 ; U6_S1.3@4785,8162.17 4785,8230 ; D2_S1.2@4785,8770 4785,8230
  Top Layer w150: 4075,8925 4115.16,8925 4420,8925 4575,8770 D1_S1.1@4582.87,8770 D2_S1.2@4762.87,8770 4785,8770 Q3_S1.2@5155,8770
  Bottom Layer w8: Q3_S1.2@5245,8665.63 Q3_S1.2@5410,8665.63 ; Q3_S1.2@5250,8915.63 Q3_S1.2@5415,8915.63 ; Q3_S1.2@5555,8790.63 Q3_S1.2@5478,8790.63 ; Q3_S1.2@5478,8790.63 5460,8790.63 5460,8830 5478,8830 Q3_S1.2@5478,8790.63
  Bottom Layer w12: v1(4475,8220) 4730,8220 v1(4730,8225)
  Bottom Layer w150: Q3_S1.2@5460,8830 5460,8915.63 5460,9900 5700,10140 5700,10560 6785,11645 JLOAD.3@6867.6,11645
  Bottom Layer w200: JLOAD.3@6825,11645 JLOAD.3@6850,11645
  other v2: 5270,8675 5435,8675 5275,8925 5440,8925